# EAGLE board slave (EAGLE 7.0.0)
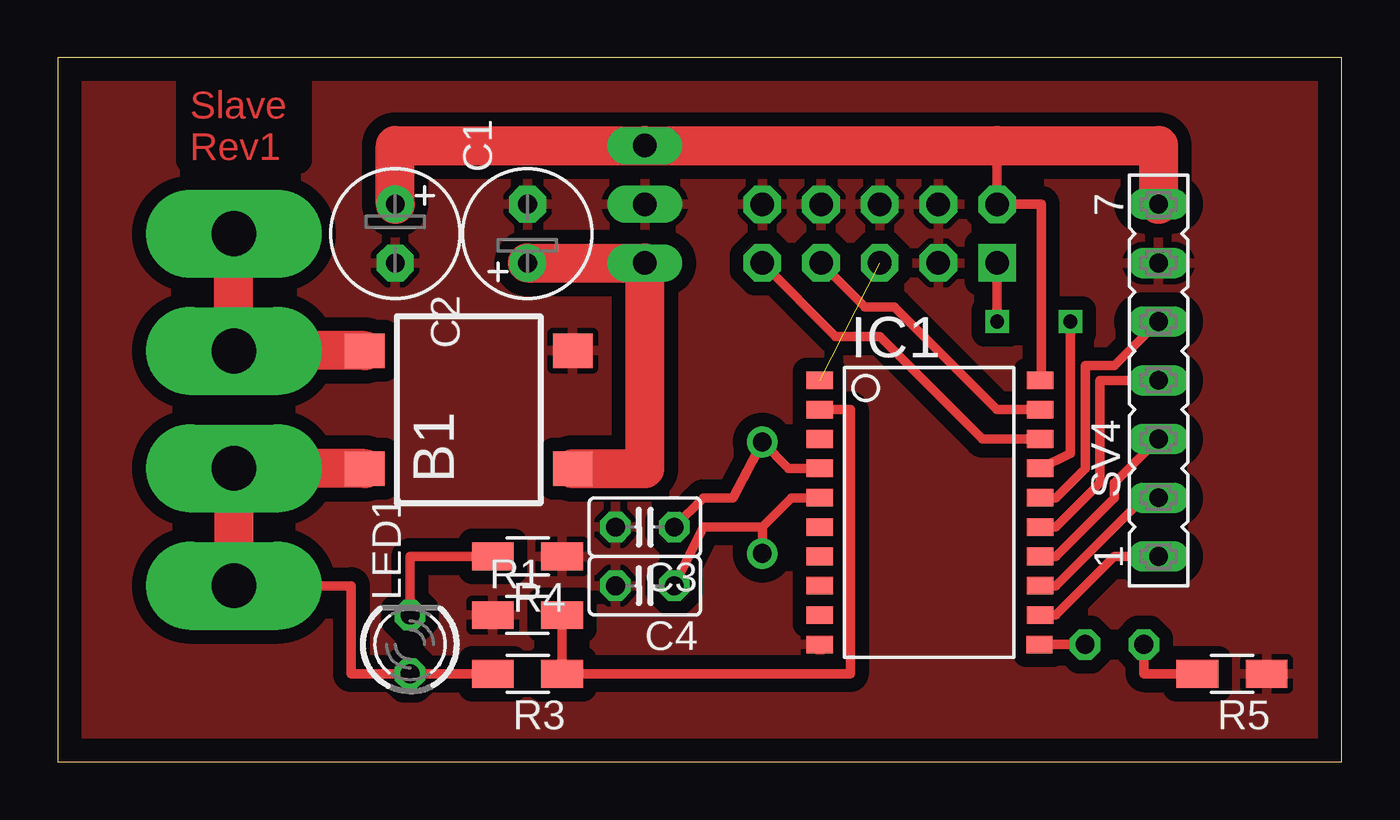
[diagram p0: board, top side]
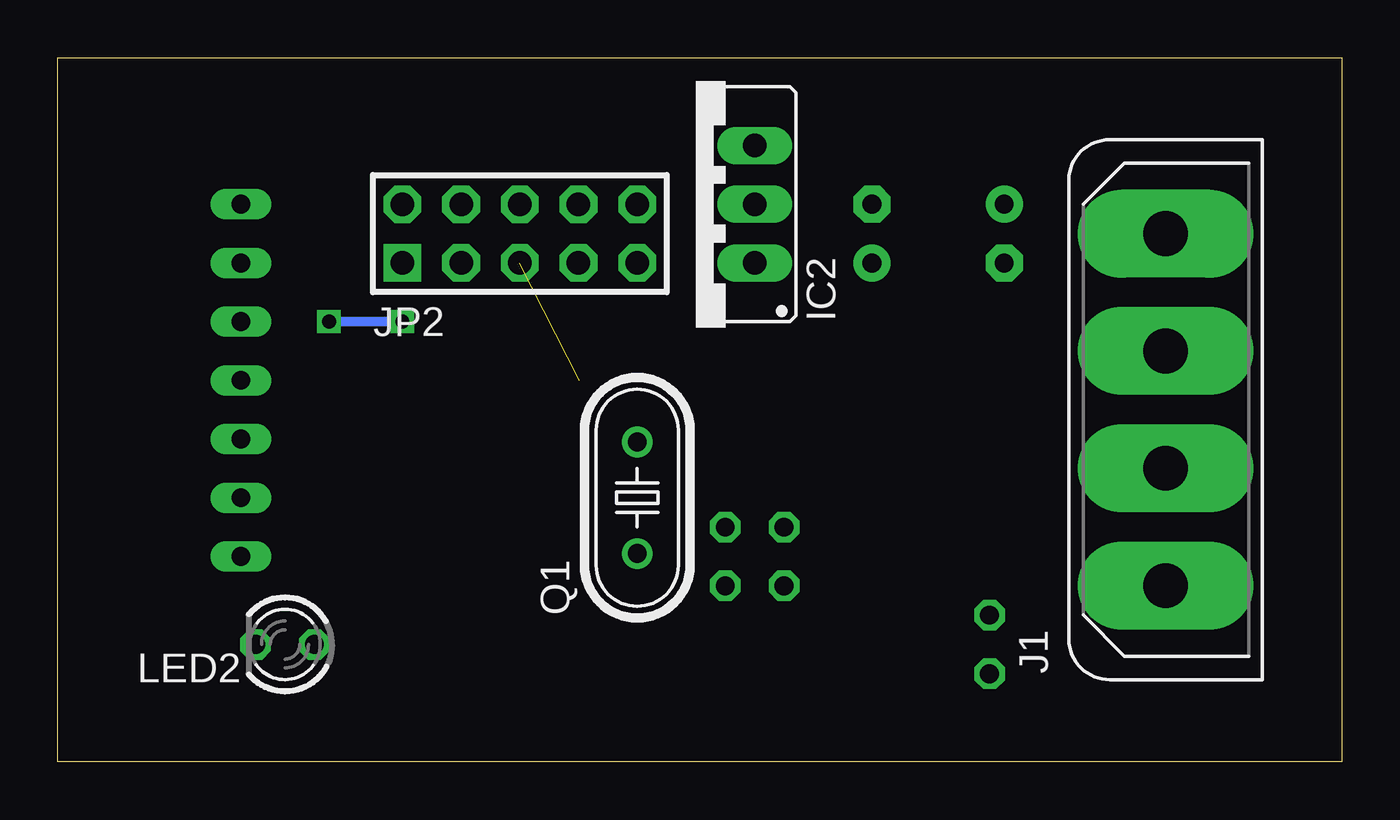
[diagram p1: board, bottom side, seen from below]

Size 55.55 x 30.47 mm. Coordinates in mm from the lower left corner, seen from the top.
Outline: 0,0 55.55,0 55.55,30.47 0,30.47 0,0
Copper layers (1*16): Top 0.035mm / dielectric 1.5mm / Bottom 0.035mm
Design rules "default *": minimum track width 10mil, minimum drill 1mm, track to track 8mil, track to pad 8mil, pad to pad 8mil, via to via 8mil, smd to smd 8mil, copper to edge 40mil, drill to drill 8mil, minimum pad ring 10mil, minimum via ring 8mil, stop-mask expansion 4mil, vias tented up to drill 0mil, thermal gap 10mil

## Footprints (pad centres in the part's own frame; a part is rotated, then mirrored left to right if it is on the bottom)
B40S = smd 1.5 x 1.7: + -2.55,-4.5; - 2.55,-4.5; AC1 -2.55,4.5; AC2 2.55,4.5
E2,5-6 = drill 0.813 pad 1.6: + -1.27,0 | drill 0.813 pad 1.6 octagon: - 1.27,0
C025-025X050 = drill 0.813 octagon: 1 -1.27,0; 2 1.27,0
SO20L = smd 0.762 x 1.143: 1 -5.08,-5.131; 2 -3.81,-5.131; 3 -2.54,-5.131; 4 -1.27,-5.131; 5 0,-5.131; 6 1.27,-5.131; 7 2.54,-5.131; 8 3.81,-5.131; 9 5.08,-5.131; 10 6.35,-5.131; 11 6.35,4.369; 12 5.08,4.394; 13 3.81,4.394; 14 2.54,4.394; 15 1.27,4.394; 16 0,4.394; 17 -1.27,4.394; 18 -2.54,4.394; 19 -3.81,4.394; 20 -5.08,4.394
78XXS = drill 1.016 long: GND 0,-2.54; IN -2.54,-2.54; OUT 2.54,-2.54
FLOPPY-4 = drill 1.93 pad 3.81 long: 1 7.62,0; 2 2.54,0; 3 -2.54,0; 4 -7.62,0
AVR-ISP-10 = drill 1.016 square: 1 -5.08,-1.27 | drill 1.016 octagon: 2 -5.08,1.27; 3 -2.54,-1.27; 4 -2.54,1.27; 5 0,-1.27; 6 0,1.27; 7 2.54,-1.27; 8 2.54,1.27; 9 5.08,-1.27; 10 5.08,1.27
LED3MM = drill 0.813 octagon: A -1.27,0; K 1.27,0
HC49U-V = drill 0.813: 1 -2.413,0; 2 2.413,0
R1206W = smd 1.8 x 1.2: 1 -1.499,0; 2 1.499,0
FE07 = drill 0.813 long: 1 -7.62,0; 2 -5.08,0; 3 -2.54,0; 4 0,0; 5 2.54,0; 6 5.08,0; 7 7.62,0

## Placement (x,y rotation side)
B1  RECTIFIER-B40S  [B40S]  17.78,15.24 90 top
C1  100u  [E2,5-6]  20.32,22.86 90 top
C2  100u  [E2,5-6]  14.61,22.86 270 top
C3  22p  [C025-025X050]  25.4,10.16 180 top
C4  22p  [C025-025X050]  25.4,7.62 180 top
IC1  AT90S2313S  [SO20L]  38.1,11.43 270 top
IC2  5V  [78XXS]  27.94,24.13 90 bottom
J1  [FLOPPY-4]  7.62,15.24 90 bottom
JP2  AVR-ISP-10  [AVR-ISP-10]  35.56,22.86 0 bottom
LED1  [LED3MM]  15.24,5.08 90 top
LED2  [LED3MM]  45.72,5.08 180 bottom
Q1  3,686411M  [HC49U-V]  30.48,11.43 90 bottom
R1  3.3k  [R1206W]  20.32,6.35 0 top
R3  8.2k  [R1206W]  20.32,3.81 180 top
R4  2k  [R1206W]  20.32,8.89 180 top
R5  680  [R1206W]  50.8,3.81 180 top
SV4  [FE07]  47.62,16.51 90 top

## Library data of the parts
B1 = rectifier
C1-C4 R1 R3-R5 = resistor
IC1 = atmel; OC_FARNELL: unknown; OC_NEWARK: unknown
IC2 = v-reg
J1 = con-amp
JP2 = avr-7
LED1 LED2 = led
Q1 = crystal; OC_FARNELL: 1666969; OC_NEWARK: unknown
SV4 = con-lsta; OC_FARNELL: unknown; OC_NEWARK: unknown

## Nets
GND: B1.- C1.- C2.- C3.2 C4.2 IC1.10 IC2.GND JP2.3 JP2.4 JP2.6 JP2.8 JP2.10 R1.1 R4.1 R5.1 SV4.6
N$1: B1.+ C1.+ IC2.IN
N$2: IC1.2 R1.2 R3.1
N$3: LED1.K R4.2
N$4: IC1.11 LED2.A
N$5: IC1.12 SV4.1
N$6: B1.AC1 J1.3 J1.4 LED1.A R3.2
N$7: C3.1 IC1.4 Q1.2
N$8: IC1.13 SV4.2
N$9: IC1.14 SV4.3
N$10: B1.AC2 J1.1 J1.2
N$11: LED2.K R5.2
N$12: IC1.19 JP2.7
N$13: IC1.18 JP2.9
N$14: IC1.17 JP2.1
N$15: IC1.1 JP2.5
N$16: C4.1 IC1.5 Q1.1
N$17: IC1.15 SV4.4
N$18: IC1.16 SV4.5
VCC: C2.+ IC1.20 IC2.OUT JP2.2 SV4.7

## Tracks (layer width: path | path; a pad name or v marks a point on that pad's centre or on a via)
GND
  pour Top (isolate 0.6): 0,30.48 55.88,30.48 55.88,0 0,0
N$1
  Top 1.676: B1.+ 25.4,12.69 IC2.IN C1.+
N$2
  Top 0.406: R1.2 R3.1 34.29,3.81 34.29,15.24 IC1.2
N$3
  Top 0.406: LED1.K 15.24,8.89 R4.2
N$4
  Top 0.406: IC1.11 LED2.A
N$5
  Top 0.406: IC1.12 43.18,6.35 45.72,8.89 SV4.1
N$6
  Top 0.406: R3.2 LED1.A 12.7,3.81 12.7,7.62 J1.4
  Top 1.676: J1.4 J1.3 B1.AC1
N$7
  Top 0.406: C3.1 27.94,11.43 29.21,11.43 Q1.2 31.62,12.7 IC1.4
N$8
  Top 0.406: IC1.13 43.18,7.62 46.99,11.43 SV4.2
N$9
  Top 0.406: IC1.14 43.18,8.89 45.72,11.43 45.72,12.07 SV4.3
N$10
  Top 1.676: J1.1 J1.2 B1.AC2
N$11
  Top 0.406: LED2.K 46.99,3.81 R5.2
N$12
  Top 0.406: JP2.7 34.92,19.68 36.2,19.68 40.64,15.24 IC1.19
N$13
  Top 0.406: JP2.9 33.66,18.41 35.56,18.41 40.01,13.97 IC1.18
N$14  (via drill 0.6)
  Top 0.406: IC1.17 43.81,13.34 v43.81,19.05 | v40.64,19.05 JP2.1
  Bottom 0.406: v43.81,19.05 v40.64,19.05
N$15  (1 unrouted)
N$16
  Top 0.406: 30.48,10.16 27.94,10.16 C4.1 | Q1.1 30.48,10.16 | 30.48,10.16 31.75,11.43 IC1.5
N$17
  Top 0.406: IC1.15 43.18,10.16 45.09,12.07 45.09,16.51 SV4.4
N$18
  Top 0.406: IC1.16 43.18,11.43 44.45,12.7 44.45,17.14 45.72,17.14 SV4.5
VCC
  Top 0.406: 40.64,26.67 JP2.2 42.55,24.13 42.55,16.51 IC1.20
  Top 1.676: C2.+ 14.61,26.67 IC2.OUT 40.64,26.67 47.62,26.67 SV4.7

## Text on the board
Top: Slave / Rev1